# Altium PCB binbot_board_ver7.PcbDoc
Units mm, origin at the board's own origin, x right, y up, seen from the top; angles counter-clockwise.
Board outline 120.96 x 80.85 mm, 2 copper layers (Top Layer, Bottom Layer); 29 components, 0 nets, 128 pads, 36 vias.
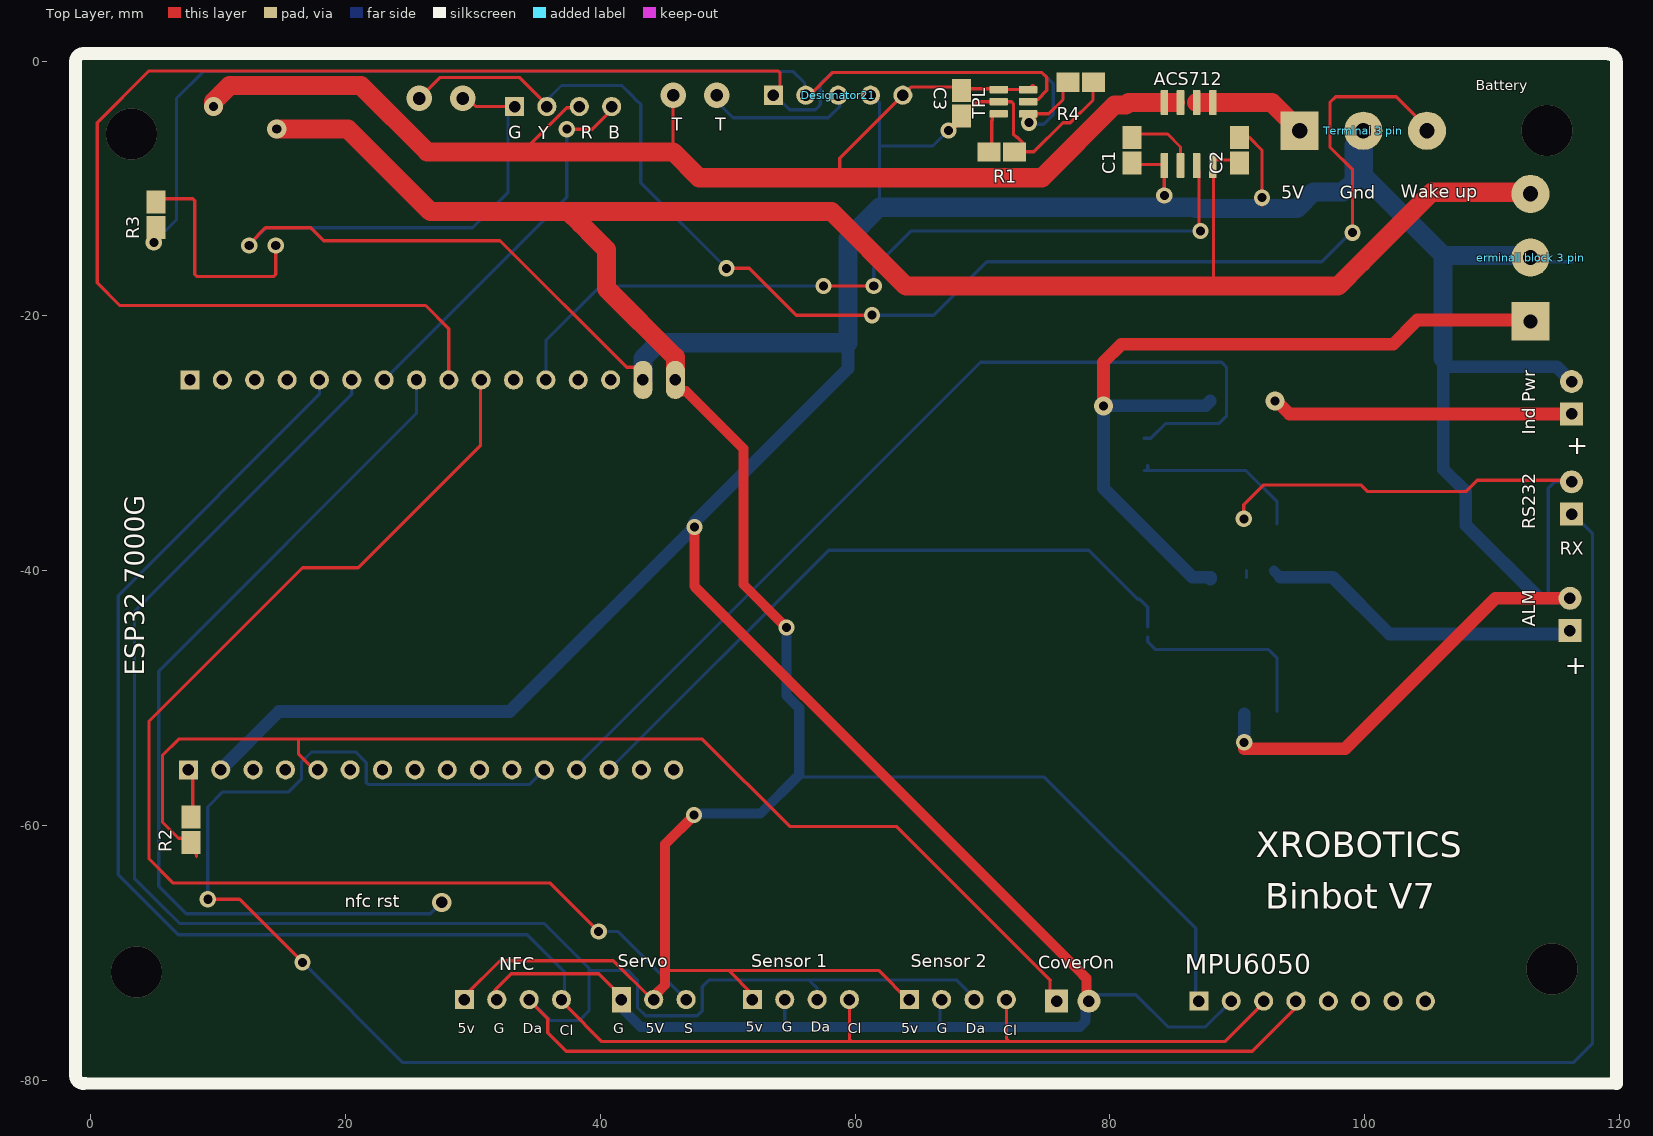
[diagram p0: Top Layer view]
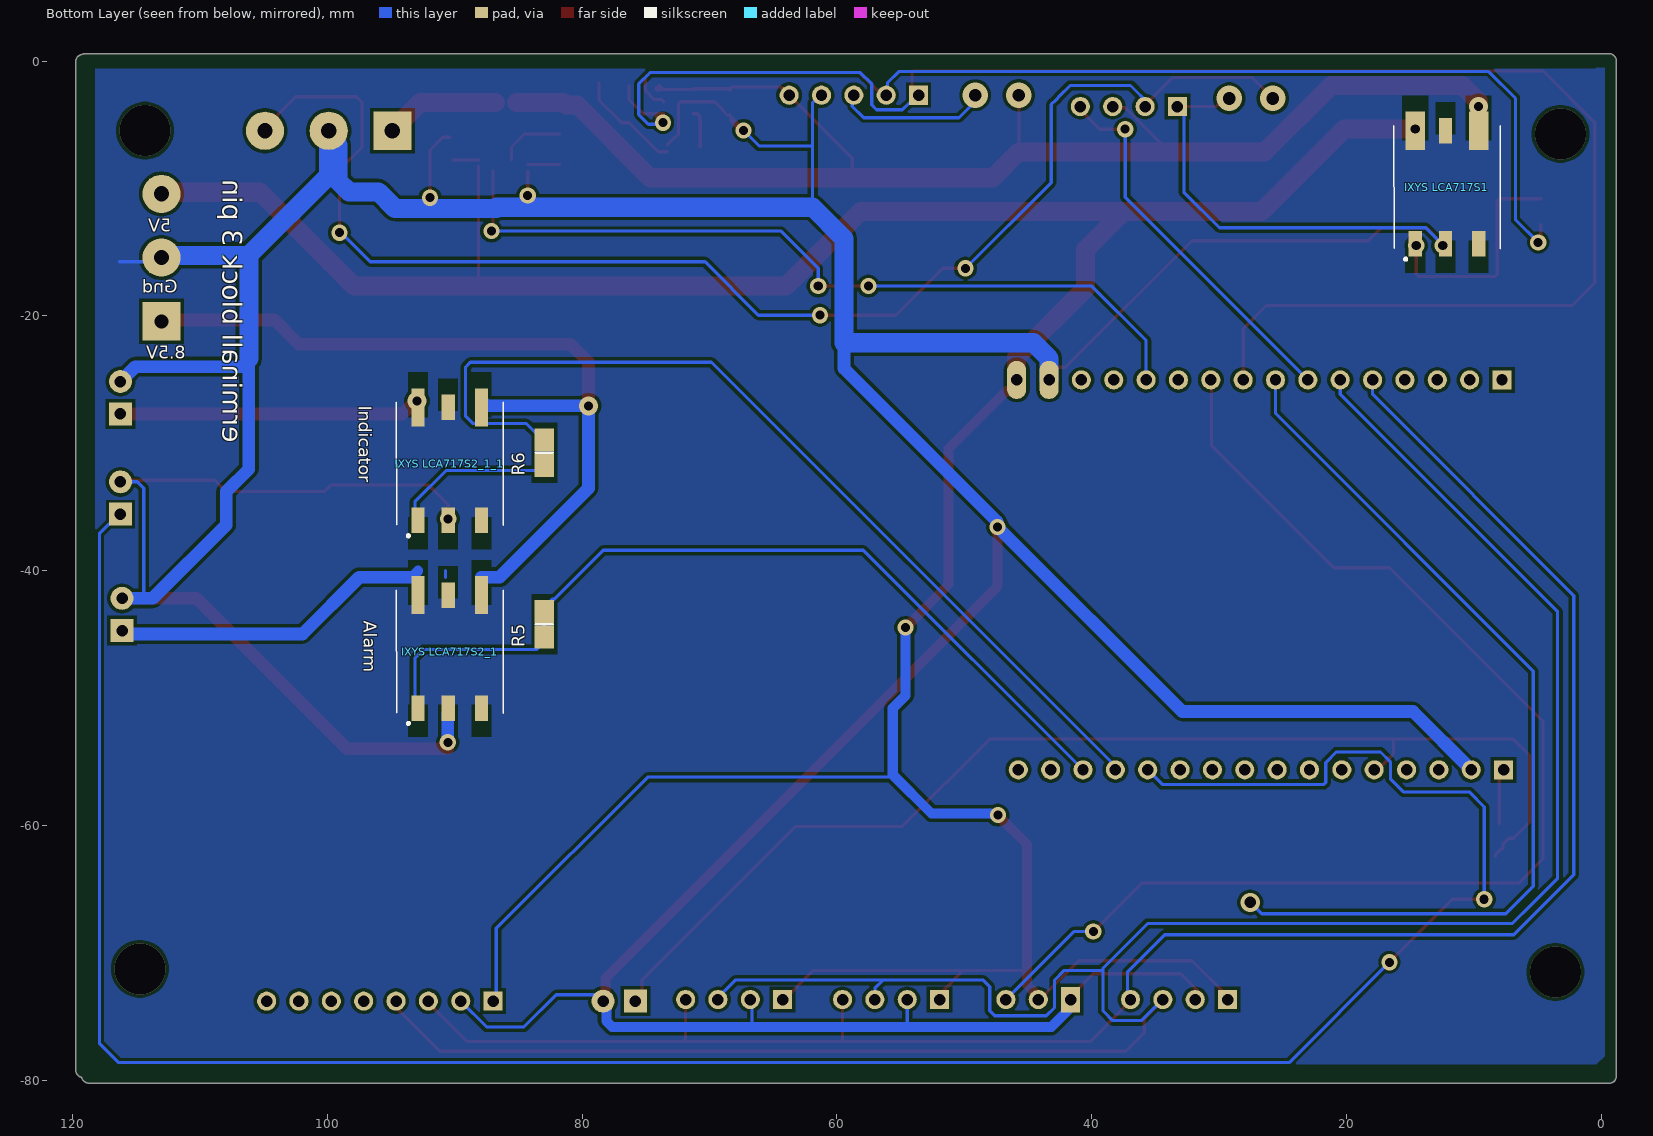
[diagram p1: Bottom Layer view, seen from below]

## Layer stack, top to bottom
Top Solder: solder mask 0.0102, Solder Resist, Dk 3.5
Top Layer: signal copper 0.0356
Dielectric 1: dielectric 0.32, FR-4, Dk 4.8
Bottom Layer: signal copper 0.0356
Bottom Solder: solder mask 0.0102, Solder Resist, Dk 3.5

## Board outline
-0.442,-80.229 cw(c-0.589,-79.647) -1.189,-79.647 -1.189,0 cw(c-0.589,0) -0.589,0.6 118.97,0.6 cw(c118.97,0) 119.231,0.541 cw(c119.172,-0.057) 119.773,-0.057 119.773,-79.175 cw(c119.172,-79.175) 119.304,-79.761 cw(c118.718,-79.629) 118.718,-80.229

## Design rules (kind name [scope] priority, off if disabled: settings)
Clearance [All] p1: gap=0.254 ignorepadtopadclearanceinfootprint=FALSE except(0: Arc-Hole Track-Hole SMDPad-Hole THPad-Hole Via-Hole Fill-Hole Poly-Hole Region-Hole Text-Hole)
PolygonConnect [All] p1: connectstyle=Relief reliefconductorwidth=0.254 reliefentries=4 polygonreliefangle="90 Angle" airgapwidth=0.254
RoutingVias [All] p1: holewidth=0.711 width=1.27 viastyle="Through Hole" minholewidth=0.711 minwidth=1.27 maxholewidth=0.711 maxwidth=1.27
SolderMaskExpansion [All] p1: expansion=0.102 istentingtop=FALSE
Width [All] p1: maxlimit=0.254 minlimit=0.254 preferedwidth=0.254
30 further rules are at their usual default settings.

## Components (designator, comment, footprint, x,y, rotation, side; value= is the part's Value field where it differs from the comment)
ACS712 "ACS712ELCTR-20A-T" SOIC127P600X175-8N 86.185,-5.715 r270 top
ALM "Comment" HDR1X2 116.251,-27.686 r90 top
C1 "1nF" 6-0805_M 81.74,-6.985 r90 top (schematic designator R2)
C2 "100nF" 6-0805_M 90.17,-6.985 r90 top (schematic designator R2)
C3 "0.1μf" 6-0805_M 68.372,-3.302 r90 top
CoverOn "Comment" HDR1X2 75.819,-73.787 r0 top
Designator21 "Comment" HDR1X5 53.594,-2.667 r0 top
"erminall block 3 pin" "Terminall block 3 pin" TE_282836-3#1 113.03,-15.414 r90 top
"ESP32 7000G" "ESP32 7000G" HDR1X16#1 7.793,-25.019 r0 top
"Ind Pwr" "Comment" HDR1X2 116.124,-44.704 r90 top
"IXYS LCA717S1" "IXYS LCA717S" *SON160P500X500X140-6N#1 12.111,-9.897 r90 bottom
"IXYS LCA717S2_1" "IXYS LCA717S" *SON160P500X500X140-6N#2 90.394,-46.346 r90 bottom
"IXYS LCA717S2_1_1" "IXYS LCA717S" *SON160P500X500X140-6N#2 90.394,-31.614 r90 bottom
MPU6050 "Comment" HDR1X8 86.995,-73.787 r0 top
NFC "Comment" HDR1X4 29.337,-73.66 r0 top
R1 "180K Ohms" 6-0805_M 71.525,-7.112 r0 top (schematic designator R3)
R2 "4.7K Ohms" 6-0805_M 7.874,-60.325 r90 top (schematic designator R3)
R3 "0.5K Ohms" 6-0805_M 5.126,-12.065 r90 top (schematic designator R2)
R4 "180K Ohms" 6-0805_M 77.724,-1.651 r0 top (schematic designator R2)
R5 "0.5K Ohms" 6-0805_M 82.977,-44.212 r90 bottom (schematic designator R3)
R6 "0.5K Ohms" 6-0805_M 82.977,-30.75 r90 bottom (schematic designator R3)
RS232 "Comment" HDR1X2 116.251,-35.56 r90 top
"Sensor 1" "TOF10120" HDR1X4 51.943,-73.66 r0 top
"Sensor 2" "TOF10120" HDR1X4 64.262,-73.66 r0 top
Servo "Comment" HDR1X3 41.656,-73.66 r0 top
"Terminal 3 pin" "Terminal 3 pin" TE_282836-3#2 99.902,-5.461 r0 top
TPL "TPL5110" SOT95P280X110-6N 72.436,-3.175 r0 top
? "Header 4 pin" HDR1X4 33.274,-3.556 r0 top
? "Comment" HDR1X16#2 7.666,-55.626 r0 top

## Footprints (in the part's own frame and the unit in brackets; to place one, negate y for a bottom-side part, rotate by r counter-clockwise, add the part's x,y. Pads: shape width x height; smd on the part's side, far side on the other; paste and mask are expansions set on the pad)
6-0805_M [mm] "Chip Resistor, Body 2.0x1.2mm, IPC Low Density"
  rect 1.8x1.5 smd: 1(-1,0) 2(1,0)
  body extent -1.07,-0.7 1.07,0.7, height 0.7
*SON160P500X500X140-6N#1 [mm]
  rect 2x1.03 smd: 1(-4.436,2.489) 2(-4.436,0.127) 3(-4.436,-2.489) 5(4.436,0.127)
  rect 3x1.5 smd: 4(4.436,-2.489) 6(4.436,2.489)
  silkscreen extent -5.74,-4.19 4.83,4.19
*SON160P500X500X140-6N#2 [mm]
  rect 2x1.03 smd: 1(-4.436,2.489) 2(-4.436,0.127) 3(-4.436,-2.489) 5(4.436,0.127)
  rect 3x1.03 smd: 4(4.436,-2.489) 6(4.436,2.489)
  silkscreen extent -5.74,-4.19 4.83,4.19
HDR1X2 [mm] "Connector; Header; 2 Position"
  rect 1.8x1.8 hole 0.9: 1(0,0)
  round 1.8 hole 0.9: 2(2.54,0)
HDR1X3 [mm] "Connector; Header; 3 Position"
  rect 1.5x2 hole 0.9: 1(0,0)
  round 1.5 hole 0.9: 2(2.54,0) 3(5.08,0)
HDR1X4 [mm] "Connector; Header; 4 Position"
  rect 1.5x1.5 hole 0.9: 1(0,0)
  round 1.5 hole 0.9: 2(2.54,0) 3(5.08,0) 4(7.62,0)
HDR1X5 [mm] "Connector; Header; 5 Position"
  rect 1.5x1.5 hole 0.9: 1(0,0)
  round 1.5 hole 0.9: 2(2.54,0) 3(5.08,0) 4(7.62,0) 5(10.16,0)
HDR1X8 [mm] "Connector; Header; 8 Position"
  rect 1.5x1.5 hole 0.9: 1(0,0)
  round 1.5 hole 0.9: 2(2.54,0) 3(5.08,0) 4(7.62,0) 5(10.16,0) 6(12.7,0) 7(15.24,0) 8(17.78,0)
HDR1X16#1 [mm] "Connector; Header; 16 Position"
  rect 1.5x1.5 hole 0.9: 1(0,0)
  round 1.5 hole 0.9: 2(2.54,0) 3(5.08,0) 4(7.62,0) 5(10.16,0) 6(12.7,0) 7(15.24,0) 8(17.78,0) 9(20.32,0) 10(22.86,0) 11(25.4,0) 12(27.94,0) 13(30.48,0) 14(33.02,0)
  oval 1.5x3 hole 0.9: 15(35.56,0) 16(38.1,0)
HDR1X16#2 [mm] "Connector; Header; 16 Position"
  rect 1.5x1.5 hole 0.9: 1(0,0)
  round 1.5 hole 0.9: 2(2.54,0) 3(5.08,0) 4(7.62,0) 5(10.16,0) 6(12.7,0) 7(15.24,0) 8(17.78,0) 9(20.32,0) 10(22.86,0) 11(25.4,0) 12(27.94,0) 13(30.48,0) 14(33.02,0) 15(35.56,0) 16(38.1,0)
SOIC127P600X175-8N [mm]
  rrect25% 1.97x0.6 smd: 1(-2.475,1.905) 2(-2.475,0.635) 3(-2.475,-0.635) 4(-2.475,-1.905) 5(2.475,-1.905) 6(2.475,-0.635) 7(2.475,0.635) 8(2.475,1.905)
  body extent -2.45,-3 2.45,3, height 1.75
SOT95P280X110-6N [mm]
  rrect25% 1.45x0.59 smd: 1(-1.155,0.95) 2(-1.155,0) 3(-1.155,-0.95) 4(1.155,-0.95) 5(1.155,0) 6(1.155,0.95)
TE_282836-3#1 [mm]
  rect 3x3 hole 1.1: 1(-5,0)
  round 3 hole 1.2: 2(0,0) 3(5,0)
TE_282836-3#2 [mm]
  rect 3x3 hole 1.2: 1(-5,0)
  round 3 hole 1.2: 2(0,0) 3(5,0)

## Via types
v1: diameter 1.27, hole 0.711, Top Layer to Bottom Layer, 22 vias
v2: diameter 1.5, hole 0.711, Top Layer to Bottom Layer, 5 vias
v3: diameter 2, hole 1, Top Layer to Bottom Layer, 4 vias
v4: diameter 4, hole 4, Top Layer to Bottom Layer, 4 vias
v5: diameter 1.5, hole 0.9, Top Layer to Bottom Layer, 1 vias

## Nets (pads, with @x,y where several pads share a name; then routed paths per layer and width w, separated by ;. In a path a pad name is that pad's centre, name@x,y a point inside that pad or via, vN(x,y) a via of type N, cw(c..) or ccw(c..) an arc to the next point about the centre after c; other vN are vias at no path point)
pads on no net: "erminall block 3 pin.1" "erminall block 3 pin.2" "erminall block 3 pin.3" "ESP32 7000G.1" "ESP32 7000G.2" "ESP32 7000G.3" "ESP32 7000G.4" "ESP32 7000G.5" "ESP32 7000G.6" "ESP32 7000G.7" "ESP32 7000G.8" "ESP32 7000G.9" "ESP32 7000G.10" "ESP32 7000G.11" "ESP32 7000G.12" "ESP32 7000G.13" "ESP32 7000G.14" "ESP32 7000G.15" "ESP32 7000G.16" "Ind Pwr.1" "Ind Pwr.2" "IXYS LCA717S1.1" "IXYS LCA717S1.2" "IXYS LCA717S1.3" "IXYS LCA717S1.4" "IXYS LCA717S1.5" "IXYS LCA717S1.6" "IXYS LCA717S2_1.1" "IXYS LCA717S2_1.2" "IXYS LCA717S2_1.3" "IXYS LCA717S2_1.4" "IXYS LCA717S2_1.5" "IXYS LCA717S2_1.6" "IXYS LCA717S2_1_1.1" "IXYS LCA717S2_1_1.2" "IXYS LCA717S2_1_1.3" "IXYS LCA717S2_1_1.4" "IXYS LCA717S2_1_1.5" "IXYS LCA717S2_1_1.6" "Sensor 1.1" "Sensor 1.2" "Sensor 1.3" "Sensor 1.4" "Sensor 2.1" "Sensor 2.2" "Sensor 2.3" "Sensor 2.4" "Terminal 3 pin.1" "Terminal 3 pin.2" "Terminal 3 pin.3" ?.1 ?.2 ?.3 ?.4 ?.5 ?.6 ?.7 ?.8 ?.9 ?.10 ?.11 ?.12 ?.13 ?.14 ?.15 ?.16 ACS712.1 ACS712.2 ACS712.3 ACS712.4 ACS712.5 ACS712.6 ACS712.7 ACS712.8 ALM.1 ALM.2 C1.1 C1.2 C2.1 C2.2 C3.1 C3.2 CoverOn.1 CoverOn.2 Designator21.1 Designator21.2 Designator21.3 Designator21.4 Designator21.5 MPU6050.1 MPU6050.2 MPU6050.3 MPU6050.4 MPU6050.5 MPU6050.6 MPU6050.7 MPU6050.8 NFC.1 NFC.2 NFC.3 NFC.4 R1.1 R1.2 R2.1 R2.2 R3.1 R3.2 R4.1 R4.2 R5.1 R5.2 R6.1 R6.2 RS232.1 RS232.2 Servo.1 Servo.2 Servo.3 TPL.1 TPL.2 TPL.3 TPL.4 TPL.5 TPL.6
copper on no net: | length 2458.7
  Top Layer w0.254: 4.711,-10.795 8.025,-10.795 8.174,-10.944 8.174,-16.742 8.323,-16.891 14.375,-16.891 14.524,-16.742 v1(14.524,-14.478) ; v1@4.745,-14.351 4.745,-12.827 ; 7.666,-55.626 8.001,-55.961 8.001,-59.874 ; 8.307,-62.409 8.307,-62.298 7.835,-61.825 7.723,-61.825 7.723,-61.466 7.251,-60.994 6.892,-60.994 5.634,-59.736 5.634,-54.483 6.904,-53.213 16.302,-53.213 ; v1(9.19,-65.786) 11.684,-65.786 v1(16.637,-70.739) ; v1(12.446,-14.478) v1@12.446,-14.219 ; v1@12.512,-14.285 13.716,-13.081 17.272,-13.081 18.288,-14.097 32.131,-14.097 42.065,-24.031 42.778,-24.031 43.353,-24.606 43.353,-24.765 43.353,-25.019 ; 12.746,-55.626 12.954,-55.834 ; 15.667,-55.626 15.667,-55.507 ; 17.789,-55.843 16.302,-54.356 16.302,-53.213 ; 17.953,-25.227 17.953,-25.019 ; v3(25.781,-2.921) 27.432,-1.27 33.655,-1.27 35.56,-3.175 ; 28.113,-25.019 28.113,-21.001 26.289,-19.177 2.286,-19.177 0.508,-17.399 0.508,-4.826 4.572,-0.762 53.953,-0.762 54.102,-0.911 54.102,-2.159 53.721,-2.54 ; v3(29.21,-2.921) 29.597,-2.921 30.232,-3.556 32.861,-3.556 ; 29.337,-73.406 32.131,-70.612 41.021,-70.612 43.942,-73.533 44.069,-73.533 45.085,-72.517 ; 30.607,-25.235 30.607,-30.145 20.987,-39.765 16.623,-39.765 4.572,-51.816 4.572,-62.611 6.477,-64.516 32.639,-64.516 35.433,-64.516 36.068,-64.516 v1(39.878,-68.326) ; 31.75,-73.787 31.75,-72.898 33.02,-71.628 39.878,-71.628 41.529,-73.279 ; 34.417,-73.66 34.417,-73.701 35.88,-75.164 35.88,-76.266 37.338,-77.724 91.186,-77.724 94.615,-74.295 94.615,-73.914 ; 34.504,-7.215 34.504,-6.517 37.372,-3.649 37.959,-3.649 38.052,-3.556 ; 36.703,-73.533 37.437,-74.267 40.132,-76.962 43.942,-76.962 89.039,-76.962 92.081,-73.92 ; v1(37.372,-5.334) 39.37,-5.334 40.894,-3.81 40.894,-3.556 ; 37.511,-11.811 37.511,-11.557 ; 40.321,-24.781 40.492,-24.781 41.067,-25.356 41.067,-25.527 ; 45.085,-71.374 50.084,-71.374 ; 45.72,-7.366 45.72,-7.112 v3(45.72,-2.667) ; v1(49.911,-16.256) 51.689,-16.256 55.372,-19.939 v1@61.214,-19.939 ; 51.943,-74.168 51.943,-73.233 50.084,-71.374 ; 55.626,-2.667 56.434,-2.667 58.212,-0.889 74.676,-0.889 75.057,-1.27 75.057,-2.286 74.336,-3.007 73.759,-3.007 73.591,-3.175 ; v1(57.531,-17.653) v1(61.468,-17.653) ; 58.801,-9.144 58.801,-7.62 64.389,-2.032 68.326,-2.032 ; 59.563,-73.787 59.563,-76.77 59.755,-76.962 ; 64.262,-73.787 61.849,-71.374 50.084,-71.374 ; v1@67.749,-5.284 68.301,-4.733 68.301,-4.374 ; 67.749,-4.953 68.372,-4.33 68.372,-4.302 ; 68.372,-2.302 68.372,-2.172 68.385,-2.159 71.311,-2.159 ; 68.426,-4.228 68.596,-4.228 68.995,-3.829 68.995,-3.776 69.596,-3.175 71.281,-3.175 72.287,-3.175 72.436,-3.324 72.436,-3.715 72.436,-5.731 72.686,-5.981 72.736,-5.981 73.309,-6.554 73.309,-6.604 ; 70.739,-6.719 70.739,-4.667 70.777,-4.629 70.777,-4.293 70.945,-4.125 71.281,-4.125 ; 71.281,-2.225 73.591,-2.225 ; 71.882,-73.787 71.882,-76.718 72.126,-76.962 72.15,-76.962 ; 73.309,-7.112 74.041,-7.112 76.327,-4.826 76.905,-4.826 78.683,-3.048 78.683,-1.692 ; 73.591,-4.125 74.021,-4.125 74.189,-4.293 74.189,-4.367 ; v1@73.66,-4.953 v1@73.82,-4.953 ; 73.806,-4.125 75.209,-4.125 76.327,-3.007 76.327,-1.905 ; 73.855,-2.225 73.591,-2.225 ; 73.911,-1.905 73.872,-1.944 73.82,-1.997 73.591,-2.225 ; 75.311,-73.66 75.311,-72.155 ; 75.33,-72.155 63.246,-60.071 54.864,-60.071 48.006,-53.213 16.302,-53.213 ; 81.74,-8.112 84.28,-8.112 ; 81.74,-5.715 84.534,-5.715 85.55,-6.731 85.55,-7.747 ; v1@84.28,-10.922 84.28,-8.636 ; 86.995,-8.588 86.995,-13.208 v1(87.122,-13.335) ; 88.09,-7.747 90.17,-7.747 ; 88.138,-17.653 88.138,-14.732 88.138,-8.225 ; 90.408,-5.969 90.932,-5.969 91.948,-6.985 v1@91.948,-11.303 ; v1(90.521,-35.923) 90.521,-34.798 90.539,-34.78 91.537,-33.782 92.045,-33.274 99.733,-33.274 100.241,-33.782 107.95,-33.782 108.839,-32.893 109.495,-32.893 116.251,-32.893 117.024,-32.893 ; v1@90.551,-53.975 v1(90.551,-53.467) ; v1(99.06,-13.462) 99.06,-8.509 97.282,-6.731 97.282,-3.24 97.728,-2.794 102.489,-2.794 104.521,-4.826
  Top Layer w0.5: 73.96,-2.032 74.087,-2.159
  Top Layer w0.8: 44.069,-73.533 44.323,-73.279 45.085,-72.517 45.085,-71.374 45.085,-61.468 v1(47.371,-59.182) ; 45.893,-25.065 45.893,-25.58 46.217,-25.903 46.731,-25.903 51.243,-30.415 51.243,-40.386 51.243,-41.083 v1(54.61,-44.45) ; v1(47.388,-36.559) 47.388,-41.208 64.77,-58.591 77.466,-71.287 78.163,-71.984 78.163,-72.884 78.168,-72.889 78.168,-73.36 78.163,-73.364
  Top Layer w1: v2(79.502,-27.051) 79.502,-23.622 80.899,-22.225 102.235,-22.225 104.14,-20.32 113.157,-20.32 ; v1@90.749,-53.975 90.551,-53.975 98.471,-53.975 110.282,-42.164 116.124,-42.164 ; v2(92.964,-26.67) 93.099,-26.67 94.115,-27.686 116.251,-27.686
  Top Layer w1.5: v2(9.652,-3.556) 9.652,-3.165 10.912,-1.905 21.209,-1.905 26.416,-7.112 34.504,-7.112 45.72,-7.112 47.752,-9.144 58.801,-9.144 74.676,-9.144 80.391,-3.429 81.28,-3.429 81.469,-3.24 84.28,-3.24 85.169,-3.24 ; v2(14.605,-5.334) 20.193,-5.334 26.67,-11.811 29.337,-11.811 34.227,-11.811 ; 34.354,-11.811 37.511,-11.811 ; 40.177,-14.477 39.58,-13.88 ; 45.893,-25.019 45.893,-23.241 40.492,-17.839 40.492,-14.791 39.58,-13.88 ; 86.82,-3.24 88.09,-3.24 92.728,-3.24 94.464,-4.977 ; 113.538,-10.287 105.283,-10.287 99.788,-15.782 97.917,-17.653 64.008,-17.653 58.166,-11.811 37.511,-11.811 ; 37.511,-11.811 38.471,-12.771 39.58,-13.88
  Bottom Layer w0.254: v1(4.953,-14.224) 6.731,-12.446 6.731,-5.703 ; 6.731,-5.641 6.731,-2.921 8.843,-0.809 55.165,-0.809 56.033,-1.677 56.033,-1.964 56.285,-2.217 56.573,-2.217 ; v1(9.19,-65.786) 9.19,-58.547 10.373,-57.364 15.528,-57.364 16.556,-56.336 16.556,-55.003 17.33,-54.229 20.801,-54.229 21.636,-55.064 21.636,-56.626 21.785,-56.775 34.458,-56.775 35.606,-55.626 ; v1@12.746,-14.097 13.762,-13.081 29.972,-13.081 32.766,-10.287 32.766,-3.302 33.02,-3.048 ; v1(16.637,-70.739) 24.511,-78.613 116.378,-78.613 117.902,-77.089 117.902,-37.084 116.251,-35.433 ; 17.826,-24.892 18.207,-24.511 ; 17.953,-25.019 17.953,-26.159 2.159,-41.954 2.159,-63.881 6.858,-68.58 31.75,-68.58 34.276,-68.58 37.201,-71.505 37.201,-72.888 37.195,-72.894 37.195,-74.025 37.201,-74.031 ; 18.207,-55.626 18.398,-55.816 ; 20.366,-55.626 20.382,-55.642 ; 20.493,-25.572 20.493,-26.159 3.429,-43.224 3.429,-64.135 5.461,-66.167 6.985,-67.691 19.929,-67.691 35.614,-67.691 39.116,-71.193 39.116,-74.549 38.354,-75.311 36.114,-75.311 34.44,-73.637 ; 20.493,-25.145 20.493,-25.019 ; 23.033,-25.019 37.372,-10.68 v1(37.372,-5.334) ; 25.573,-25.019 25.573,-27.64 5.334,-47.879 5.334,-64.77 6.985,-66.421 7.493,-66.929 26.669,-66.929 v5@27.558,-66.04 ; v3@29.21,-2.667 v3@29.273,-2.73 ; 35.496,-3.365 36.957,-1.905 41.696,-1.905 42.502,-2.71 42.799,-3.008 43.18,-3.389 43.18,-9.525 v1(49.911,-16.256) ; 35.733,-25.019 35.733,-21.925 40.005,-17.653 49.012,-17.653 v1(57.531,-17.653) ; 38.146,-55.626 38.146,-55.326 69.85,-23.622 88.773,-23.622 89.154,-24.003 89.154,-27.863 88.569,-28.448 84.374,-28.448 83.231,-29.591 82.677,-29.591 ; 39.116,-71.374 40.64,-71.374 42.164,-71.374 42.926,-72.136 42.926,-74.295 43.561,-74.93 47.625,-74.93 48.006,-74.549 48.006,-72.644 48.514,-72.136 56.388,-72.136 57.023,-72.771 57.023,-73.787 ; v1(39.878,-68.326) 41.402,-68.326 46.609,-73.533 ; 40.686,-55.626 57.926,-38.386 78.351,-38.386 82.204,-42.239 82.354,-42.239 82.977,-42.862 82.977,-43.012 82.977,-44.39 ; 43.226,-55.626 43.371,-55.77 ; v3@45.593,-2.54 v3(45.72,-2.667) ; v3@48.641,-2.667 50.419,-4.445 57.912,-4.445 58.823,-3.534 ; 53.467,-2.667 54.09,-3.29 54.344,-3.29 54.864,-3.81 56.896,-3.81 57.277,-3.429 57.277,-1.778 58.166,-0.889 74.676,-0.889 75.565,-1.778 75.565,-4.191 74.803,-4.953 v1@74.168,-4.953 ; 54.483,-75.819 54.483,-73.787 ; 55.433,-56.2 74.869,-56.2 86.741,-68.072 86.741,-73.533 86.995,-73.787 ; 56.197,-72.136 67.991,-72.136 69.81,-73.954 ; 58.801,-3.512 58.801,-2.516 ; v1@61.214,-19.939 66.167,-19.939 70.358,-15.748 96.647,-15.748 v1@98.806,-13.589 ; 61.214,-2.54 61.913,-3.239 61.913,-6.657 ; v1(61.468,-17.653) 61.468,-16.256 64.389,-13.335 v1(87.122,-13.335) ; 61.913,-11.465 61.913,-6.657 ; 66.675,-75.819 66.675,-73.533 ; v1@67.495,-5.265 66.103,-6.657 61.913,-6.657 ; 77.893,-73.364 78.434,-73.364 78.519,-73.279 82.042,-73.279 84.582,-75.819 87.503,-75.819 89.535,-73.787 ; 82.677,-32.131 90.678,-32.131 93.137,-34.59 93.137,-36.322 ; 82.977,-45.212 82.977,-45.562 83.6,-46.185 92.459,-46.185 92.502,-46.228 93.137,-46.863 93.137,-51.054 ; 82.977,-32.1 82.977,-31.75 ; 90.551,-51.252 90.48,-51.181 90.629,-51.032 ; 90.724,-40.513 90.724,-40.005 ; 113.203,-15.748 116.332,-15.748 ; 114.427,-41.783 114.427,-33.528 114.935,-33.02 115.951,-33.02
  Bottom Layer w0.3: 64.008,-74.041 64.262,-73.787
  Bottom Layer w0.8: 41.529,-73.66 41.879,-74.01 41.879,-74.518 43.18,-75.819 53.213,-75.819 54.483,-75.819 64.008,-75.819 ; v1(47.371,-59.182) 47.461,-59.092 47.867,-59.092 47.904,-59.055 49.606,-59.055 52.578,-59.055 55.626,-56.007 55.626,-54.705 55.626,-52.102 55.626,-50.8 54.61,-49.784 v1(54.61,-44.45) ; 64.031,-75.819 66.675,-75.819 77.636,-75.819 78.105,-75.35 78.105,-73.66 ; 92.883,-40.005 93.391,-40.513
  Bottom Layer w1: 10.206,-55.626 14.778,-51.054 32.893,-51.054 v1(47.388,-36.559) 47.439,-36.508 47.439,-36.127 59.453,-24.113 59.453,-22.098 ; 87.89,-26.678 87.517,-27.051 v2(79.502,-27.051) 79.502,-33.528 86.476,-40.502 87.89,-40.502 87.905,-40.517 87.905,-40.648 ; v1(90.551,-53.467) 90.551,-51.252 ; 93.391,-40.513 97.506,-40.513 101.951,-44.958 116.124,-44.958 ; 106.172,-23.344 106.172,-23.98 ; 116.251,-25.146 115.085,-23.98 106.172,-23.98 ; 116.505,-42.164 113.711,-42.164 107.95,-36.403 107.95,-33.782 106.172,-32.004 106.172,-23.98
  Bottom Layer w1.5: 43.353,-25.019 43.353,-23.322 44.577,-22.098 59.182,-22.098 ; 59.453,-22.098 59.453,-13.925 61.913,-11.465 84.28,-11.465 86.741,-11.465 ; 86.741,-11.557 94.695,-11.557 95.997,-10.255 98.308,-10.255 99.187,-9.377 99.187,-8.971 99.187,-6.582 99.902,-5.867 99.902,-5.461 99.902,-6.35 99.902,-6.731 99.902,-8.971 106.172,-15.241 ; 106.172,-23.344 106.172,-15.241 ; 113.03,-15.414 112.857,-15.241 106.172,-15.241
  other v1: 61.341,-19.939 91.948,-10.712 84.28,-10.539 67.327,-5.432 73.66,-4.826
  other v2: 79.502,-27.051
  other v3: 49.149,-2.667
  other v4: 3.602,-71.501 114.727,-71.247 3.198,-5.703 114.323,-5.449
  other v5: 27.559,-66.04

## Polygon pours and split planes (outlines as drawn)
no net on Bottom Layer "NONET_L02_P000" (solid, pour order 0): 0.381,-0.508 0.463,-0.59 118.237,-0.59 118.237,-78.591 117.902,-78.926 117.716,-78.74 0.381,-78.74 -0.254,-78.105 -0.254,-0.508

## Silkscreen, mask and mechanical layers (free items; w line width, h text height)
Top Overlay:
  lines w1: 119.773,-80.264 -0.442,-80.229 cw(c-0.589,-79.647) -1.189,-79.647 -1.189,0 cw(c-0.589,0) -0.589,0.6 118.97,0.6 cw(c118.97,0) 119.231,0.541 cw(c119.172,-0.057) 119.773,-0.057 119.773,-80.137
  text "Battery" at 108.712,-2.273 h0.8
  text "T" at 45.593,-5.461 h1
  text "T" at 49.022,-5.461 h1
  text "G" at 32.766,-6.096 h1
  text "R" at 38.481,-6.096 h1
  text "B" at 40.64,-6.096 h1
  text "Y" at 35.138,-6.137 h1
  text "Wake up" at 102.859,-10.716 h1
  text "5V" at 93.472,-10.795 h1
  text "Gnd" at 98.044,-10.795 h1
  text "+" at 115.824,-30.861 h1.52
  text "RX" at 115.316,-38.735 h1
  text "+" at 115.697,-48.133 h1.52
  text "XROBOTICS" at 91.44,-62.484 h2
  text "nfc rst" at 19.939,-66.421 h1
  text "Binbot V7" at 92.202,-66.548 h2
  text "5v" at 51.435,-76.2 h0.8
  text "G" at 54.229,-76.2 h0.8
  text "Da" at 56.515,-76.2 h0.8
  text "5v" at 28.829,-76.327 h0.8
  text "G" at 31.623,-76.327 h0.8
  text "Da" at 33.909,-76.327 h0.8
  text "G" at 41.021,-76.327 h0.8
  text "5V" at 43.561,-76.327 h0.8
  text "S" at 46.609,-76.327 h0.8
  text "Cl" at 59.436,-76.327 h0.8
  text "5v" at 63.627,-76.327 h0.8
  text "G" at 66.421,-76.327 h0.8
  text "Da" at 68.707,-76.327 h0.8
  text "Cl" at 36.83,-76.454 h0.8
  text "Cl" at 71.628,-76.454 h0.8
Bottom Overlay:
  text "5V" at 112.268,-13.406 h1
  text "Gnd" at 111.735,-18.161 h1
  text "8.5V" at 111.125,-23.368 h1
  text "Indicator" at 97.536,-27.051 h1 r90
  text "Alarm" at 97.155,-43.942 h1 r90